# EAGLE board 4x1button v23 (EAGLE 9.7.0)
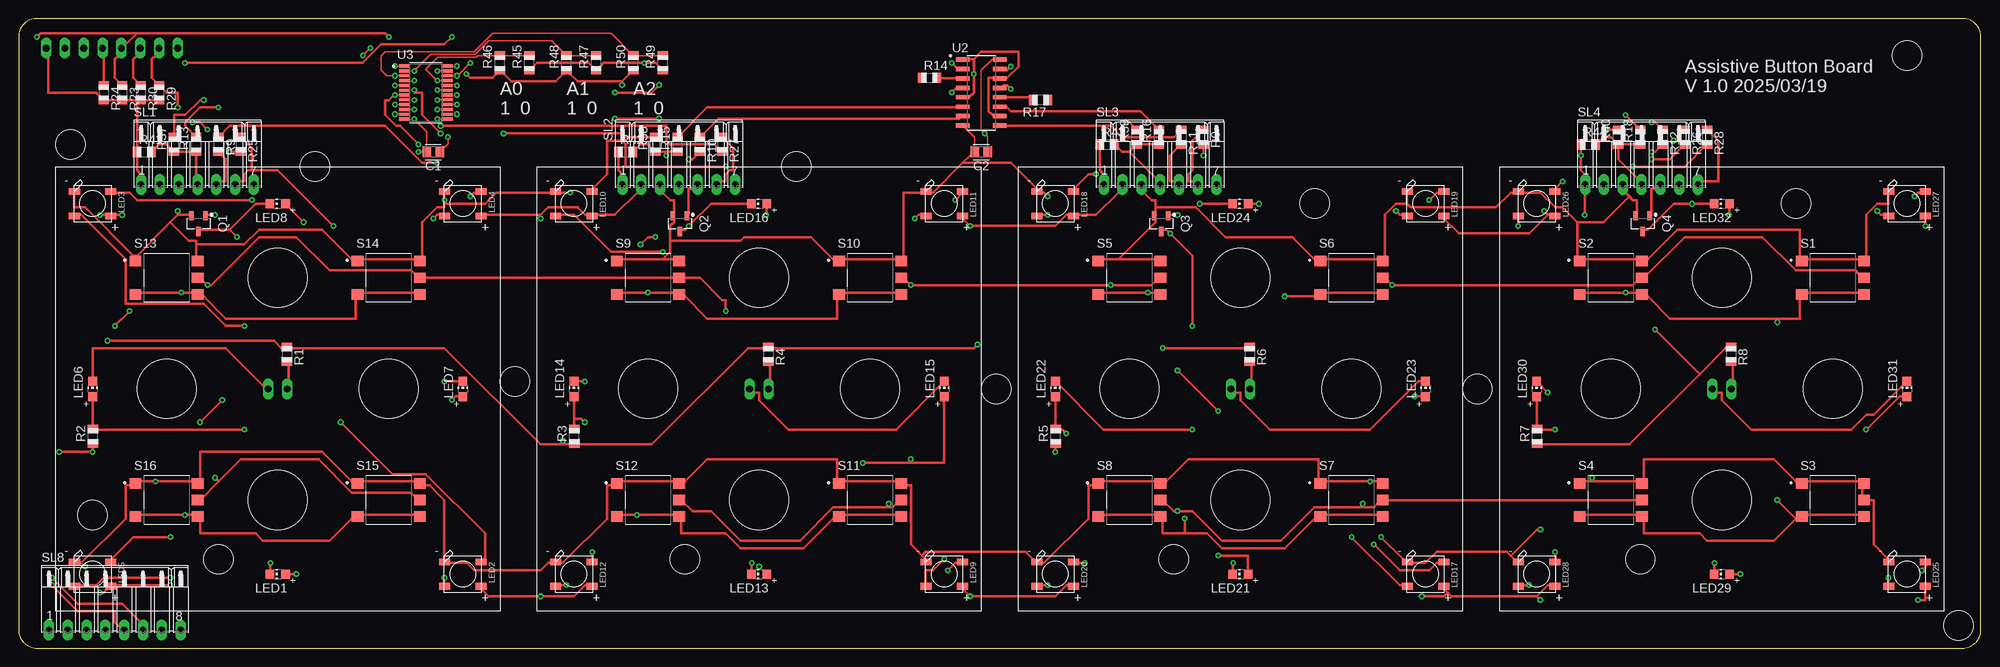
[diagram p0: board, top side]
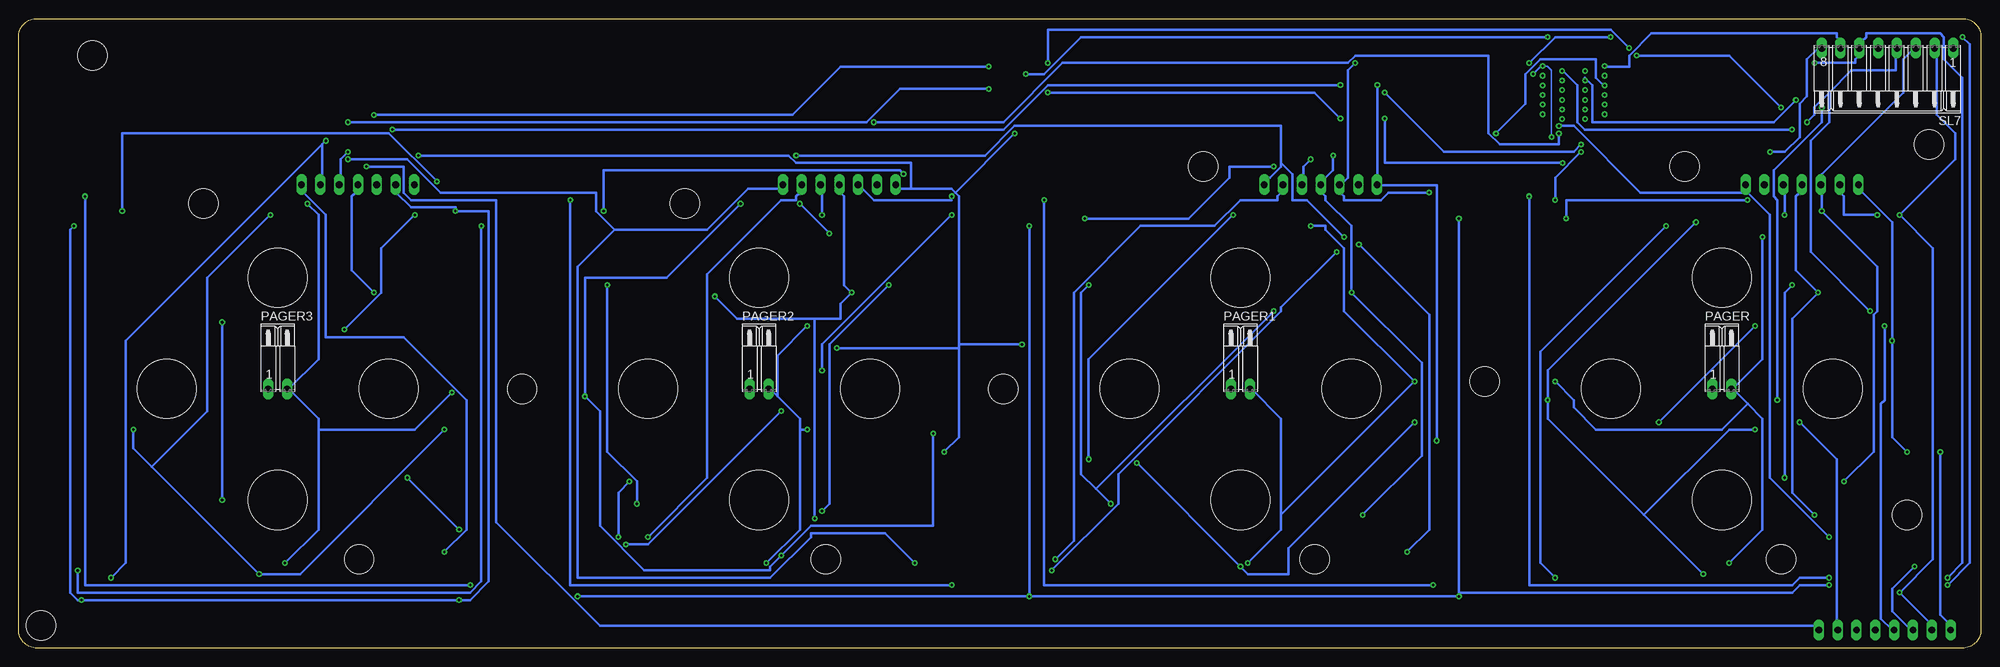
[diagram p1: board, bottom side, seen from below]

Size 265 x 85 mm. Coordinates in mm from the lower left corner, seen from the top.
Outline: 262.5,85 2.5,85 arc90 0,82.5 0,2.5 arc90 2.5,0 262.5,0 arc90 265,2.5 265,82.5 arc90 262.5,85
Copper layers (1*16): Top 0.035mm / dielectric 1.5mm / Bottom 0.035mm
Design rules "Fusion Electronics Design Rules": minimum track width 6mil, minimum drill 0.35mm, track to track 6mil, track to pad 6mil, pad to pad 6mil, via to via 6mil, smd to smd 6mil, copper to edge 40mil, drill to drill 6mil, minimum pad ring 10mil, minimum via ring 8mil, stop-mask expansion 4mil, vias tented up to drill 0mil, thermal gap 10mil
Holes 8 mm at 35,50 50,35 35,20 20,35 100,50 115,35 100,20 85,35 165,50 180,35 165,20 150,35 230,50 245,35 230,20 215,35
Holes 4 mm at 255,80 261.95,3.05 27,12 90,12 156,12 219,12 132,35 197,35 67,36 7,68 10,18 40,65 105,65 175,60 240,60

## Footprints (pad centres in the part's own frame; a part is rotated, then mirrored left to right if it is on the bottom)
CAPC2012X110 = smd 1.165 x 1.465: 1 -0.875,0; 2 0.875,0
CHIP-LED0805 = smd 1.2 x 1.2: A 0,-1.05; C 0,1.05
WS2812B = smd 1.5 x 0.9: 1-VDD 2.45,-1.65; 2-DOUT 2.45,1.65; 3-GND -2.45,1.65; 4-DIN -2.45,-1.65
02PA = drill 0.914 long: 1 -1.27,0; 2 1.27,0
SOT95P237X112-3N = smd 1.224 x 0.625: 1 -1.064,0.95; 2 -1.064,-0.95; 3 1.064,0
R0805 = smd 1.1 x 1.4: 1 -1,0; 2 1,0
SW_SKHMQLE010 = smd 1.6 x 1.4: 1 -4.2,2.25; 2 4.2,2.25; 3 -4.2,-2.25; 4 4.2,-2.25; 5 4.2,0
07PA = drill 0.914 long: 1 -7.62,0; 2 -5.08,0; 3 -2.54,0; 4 0,0; 5 2.54,0; 6 5.08,0; 7 7.62,0
08PA = drill 0.914 long: 1 -8.89,0; 2 -6.35,0; 3 -3.81,0; 4 -1.27,0; 5 1.27,0; 6 3.81,0; 7 6.35,0; 8 8.89,0
SOIC127P600X175-16N = smd 1.97 x 0.6: 1 -2.475,4.445; 2 -2.475,3.175; 3 -2.475,1.905; 4 -2.475,0.635; 5 -2.475,-0.635; 6 -2.475,-1.905; 7 -2.475,-3.175; 8 -2.475,-4.445; 9 2.475,-4.445; 10 2.475,-3.175; 11 2.475,-1.905; 12 2.475,-0.635; 13 2.475,0.635; 14 2.475,1.905; 15 2.475,3.175; 16 2.475,4.445
SOP65P640X110-24N = smd 1.57 x 0.41: 1 -2.87,3.575; 2 -2.87,2.925; 3 -2.87,2.275; 4 -2.87,1.625; 5 -2.87,0.975; 6 -2.87,0.325; 7 -2.87,-0.325; 8 -2.87,-0.975; 9 -2.87,-1.625; 10 -2.87,-2.275; 11 -2.87,-2.925; 12 -2.87,-3.575; 13 2.87,-3.575; 14 2.87,-2.925; 15 2.87,-2.275; 16 2.87,-1.625; 17 2.87,-0.975; 18 2.87,-0.325; 19 2.87,0.325; 20 2.87,0.975; 21 2.87,1.625; 22 2.87,2.275; 23 2.87,2.925; 24 2.87,3.575

## Placement (x,y rotation side)
C1  0.1uf  [CAPC2012X110]  56,67 180 top
C2  0.1uf  [CAPC2012X110]  130,67 180 top
LED1  [CHIP-LED0805]  35,10 90 top
LED2  WS2812B-V5/W  [WS2812B]  60,10 0 top
LED3  WS2812B-V5/W  [WS2812B]  10,60 0 top
LED4  WS2812B-V5/W  [WS2812B]  60,60 0 top
LED5  WS2812B-V5/W  [WS2812B]  10,10 0 top
LED6  [CHIP-LED0805]  10,35 0 top
LED7  [CHIP-LED0805]  60,35 0 top
LED8  [CHIP-LED0805]  35,60 90 top
LED9  WS2812B-V5/W  [WS2812B]  125,10 0 top
LED10  WS2812B-V5/W  [WS2812B]  75,60 0 top
LED11  WS2812B-V5/W  [WS2812B]  125,60 0 top
LED12  WS2812B-V5/W  [WS2812B]  75,10 0 top
LED13  [CHIP-LED0805]  100,10 90 top
LED14  [CHIP-LED0805]  75,35 0 top
LED15  [CHIP-LED0805]  125,35 0 top
LED16  [CHIP-LED0805]  100,60 90 top
LED17  WS2812B-V5/W  [WS2812B]  190,10 0 top
LED18  WS2812B-V5/W  [WS2812B]  140,60 0 top
LED19  WS2812B-V5/W  [WS2812B]  190,60 0 top
LED20  WS2812B-V5/W  [WS2812B]  140,10 0 top
LED21  [CHIP-LED0805]  165,10 90 top
LED22  [CHIP-LED0805]  140,35 0 top
LED23  [CHIP-LED0805]  190,35 0 top
LED24  [CHIP-LED0805]  165,60 90 top
LED25  WS2812B-V5/W  [WS2812B]  255,10 0 top
LED26  WS2812B-V5/W  [WS2812B]  205,60 0 top
LED27  WS2812B-V5/W  [WS2812B]  255,60 0 top
LED28  WS2812B-V5/W  [WS2812B]  205,10 0 top
LED29  [CHIP-LED0805]  230,10 90 top
LED30  [CHIP-LED0805]  205,35 0 top
LED31  [CHIP-LED0805]  255,35 0 top
LED32  [CHIP-LED0805]  230,60 90 top
PAGER  PAGER  [02PA]  35,35 0 bottom
PAGER1  PAGER  [02PA]  100,35 0 bottom
PAGER2  PAGER  [02PA]  165,35 0 bottom
PAGER3  PAGER  [02PA]  230,35 0 bottom
Q1  MMUN2216  [SOT95P237X112-3N]  24.29,57.31 270 top
Q2  MMUN2216  [SOT95P237X112-3N]  89.29,57.31 270 top
Q3  MMUN2216  [SOT95P237X112-3N]  154.29,57.31 270 top
Q4  MMUN2216  [SOT95P237X112-3N]  219.29,57.31 270 top
R0  10  [R0805]  160,69 270 top
R1  10  [R0805]  36.23,39.66 270 top
R2  330  [R0805]  10.07,28.61 90 top
R3  330  [R0805]  75.07,28.61 90 top
R4  10  [R0805]  101.23,39.66 270 top
R5  330  [R0805]  140.07,28.61 90 top
R6  10  [R0805]  166.23,39.66 270 top
R7  330  [R0805]  205.07,28.61 90 top
R8  10  [R0805]  231.23,39.66 270 top
R9  10  [R0805]  27,68 270 top
R10  10  [R0805]  92,68 270 top
R11  10  [R0805]  157,69 270 top
R12  10  [R0805]  222,69 270 top
R13  10  [R0805]  24,68 90 top
R14  10  [R0805]  123,77 0 top
R15  10  [R0805]  89,68 90 top
R16  10  [R0805]  154,69 90 top
R17  10  [R0805]  138,74 180 top
R18  10  [R0805]  219,69 90 top
R23  2k  [R0805]  14,75 270 top
R24  2k  [R0805]  11.5,75 270 top
R25  0  [R0805]  30,68 270 top
R26  0  [R0805]  225,69 270 top
R27  0  [R0805]  95,68 270 top
R28  0  [R0805]  228,69 270 top
R29  2k  [R0805]  19,75 270 top
R30  2k  [R0805]  16.5,75 270 top
R37  10  [R0805]  21,68 90 top
R38  10  [R0805]  86,68 90 top
R39  10  [R0805]  151,69 90 top
R40  10  [R0805]  216,69 90 top
R41  1k  [R0805]  17,67 0 top
R42  1k  [R0805]  82,67 0 top
R43  1k  [R0805]  147,68 0 top
R44  1k  [R0805]  212,68 0 top
R45  10  [R0805]  69,79 90 top
R46  DNP_10  [R0805]  65,79 90 top
R47  10  [R0805]  78,79 90 top
R48  DNP_10  [R0805]  74,79 90 top
R49  10  [R0805]  87,79 90 top
R50  DNP_10  [R0805]  83,79 90 top
S1  SKHMQLE010  [SW_SKHMQLE010]  245,50 0 top
S2  SKHMQLE010  [SW_SKHMQLE010]  215,50 0 top
S3  SKHMQLE010  [SW_SKHMQLE010]  245,20 0 top
S4  SKHMQLE010  [SW_SKHMQLE010]  215,20 0 top
S5  SKHMQLE010  [SW_SKHMQLE010]  150,50 0 top
S6  SKHMQLE010  [SW_SKHMQLE010]  180,50 0 top
S7  SKHMQLE010  [SW_SKHMQLE010]  180,20 0 top
S8  SKHMQLE010  [SW_SKHMQLE010]  150,20 0 top
S9  SKHMQLE010  [SW_SKHMQLE010]  85,50 0 top
S10  SKHMQLE010  [SW_SKHMQLE010]  115,50 0 top
S11  SKHMQLE010  [SW_SKHMQLE010]  115,20 0 top
S12  SKHMQLE010  [SW_SKHMQLE010]  85,20 0 top
S13  SKHMQLE010  [SW_SKHMQLE010]  20,50 0 top
S14  SKHMQLE010  [SW_SKHMQLE010]  50,50 0 top
S15  SKHMQLE010  [SW_SKHMQLE010]  50,20 0 top
S16  SKHMQLE010  [SW_SKHMQLE010]  20,20 0 top
SL1  [07PA]  24.16,62.56 0 top
SL2  [07PA]  89.16,62.56 0 top
SL3  [07PA]  154.16,62.56 0 top
SL4  [07PA]  219.16,62.56 0 top
SL7  [08PA]  12.62,81 180 bottom
SL8  [08PA]  13,2.44 0 top
U2  SN74LS279ADR  [SOIC127P600X175-16N]  130,75 0 top
U3  PCA9555PW,118  [SOP65P640X110-24N]  55,75 0 top

## Library data of the parts
C1 C2 = Capacitor; CATEGORY: Capacitor; PACKAGE_SIZE: 0805; PACKAGE_TYPE: SMD; SUBCATEGORY: Ceramic Capacitors; TYPE: MLCC
LED1-LED32 R0 R1-R18 R23-R30 R37-R50 = adafruit
PAGER PAGER1-PAGER3 SL1-SL4 SL7 SL8 = con-amp-quick; OC_FARNELL: unknown; OC_NEWARK: unknown
Q1-Q4 = Transistor; CATEGORY: Transistor; DATASHEET: https://www.analog.com/media/en/package-pcb-resources/package/pkg_pdf/ltc-legacy-sot-23/sot3%2005-08-1631%20rev%20d.pdf; DESCRIPTION: Generic NPN Transistor Surface Mount SOT23-BEC Package; PACKAGE_SIZE: SOT-23; PACKAGE_TYPE: SMD; SUBCATEGORY: BJT; TYPE: NPN
S1-S16 = SKHMQLE010; MANUFACTURER: E-Switch; MAXIMUM_PACKAGE_HEIGHT: 3.4 mm; STANDARD: Manufacturer Recommendations
U2 = SN74LS279ADR
U3 = PCA9555PW_118; MANUFACTURER: NXP; MAXIMUM_PACKAGE_HEIGHT: 1.1mm; PARTREV: 10; STANDARD: IPC 7351B

## Nets
1S2: R14.1
3S2: R17.1
5: S1.5 S2.5 S4.5 S5.5 S6.5 S7.5 S8.5 S9.5 S10.5 S11.5 S12.5 S13.5 S14.5 S15.5 S16.5
!INT: R29.1 SL7.7 SL8.7 U3.1
!RESET: R30.1 SL7.6 SL8.6 U2.1 U2.5 U2.10 U2.14
+3V3: C1.1 C2.1 R1.1 R2.1 R3.1 R4.1 R5.1 R6.1 R7.1 R8.1 R23.2 R24.2 R29.2 R30.2 R41.1 R42.1 R43.1 R44.1 R46.1 R48.1 R50.1 SL1.1 SL2.1 SL3.1 SL4.1 SL7.1 SL8.1 U2.16 U3.24
+5: LED2.1-VDD LED3.1-VDD LED4.1-VDD LED5.1-VDD LED9.1-VDD LED10.1-VDD LED11.1-VDD LED12.1-VDD LED17.1-VDD LED18.1-VDD LED19.1-VDD LED20.1-VDD LED25.1-VDD LED26.1-VDD LED27.1-VDD LED28.1-VDD SL1.2 SL2.2 SL3.2 SL4.2 SL7.2 SL8.2
A0: R45.2 R46.2 U3.21
A1: R47.2 R48.2 U3.2
A2: R49.2 R50.2 U3.3
BUTTON1: R13.1 R37.1 R41.2 S13.3 S13.4 S14.3 S14.4 S15.3 S15.4 S16.3 S16.4 SL1.4
BUTTON2: R15.1 R38.1 R42.2 S9.3 S9.4 S10.3 S10.4 S11.3 S11.4 S12.3 S12.4 SL2.4
BUTTON3: R16.1 R39.1 R43.2 S5.3 S5.4 S6.3 S6.4 S7.3 S7.4 S8.3 S8.4 SL3.4
BUTTON4: R18.1 R40.1 R44.2 S1.3 S1.4 S2.3 S2.4 S3.3 S3.4 S4.3 S4.4 SL4.4
D_IN1: LED2.4-DIN R25.1 SL1.6
D_IN2: LED9.4-DIN R27.1 SL2.6
D_IN3: LED17.4-DIN R0.1 SL3.6
D_IN4: LED25.4-DIN R26.1 SL4.6
D_OUT1: LED5.2-DOUT R27.2 SL1.7
D_OUT2: LED12.2-DOUT R0.2 SL2.7
D_OUT3: LED20.2-DOUT R26.2 SL3.7
D_OUT4: LED28.2-DOUT R28.1 SL4.7
FEED1: LED1.C LED6.C LED7.C LED8.C PAGER.2 Q1.3
FEED2: LED13.C LED14.C LED15.C LED16.C PAGER1.2 Q2.3
FEED3: LED21.C LED22.C LED23.C LED24.C PAGER2.2 Q3.3
FEED4: LED29.C LED30.C LED31.C LED32.C PAGER3.2 Q4.3
FEEDBACK1: Q1.1 R9.2 SL1.5
FEEDBACK2: Q2.1 R10.2 SL2.5
FEEDBACK3: Q3.1 R11.2 SL3.5
FEEDBACK4: Q4.1 R12.2 SL4.5
GND: C1.2 C2.2 LED2.3-GND LED3.3-GND LED4.3-GND LED5.3-GND LED9.3-GND LED10.3-GND LED11.3-GND LED12.3-GND LED17.3-GND LED18.3-GND LED19.3-GND LED20.3-GND LED25.3-GND LED26.3-GND LED27.3-GND LED28.3-GND Q1.2 Q2.2 Q3.2 Q4.2 R45.1 R47.1 R49.1 S1.1 S1.2 S2.1 S2.2 S3.1 S3.2 S3.5 S4.1 S4.2 S5.1 S5.2 S6.1 S6.2 S7.1 S7.2 S8.1 S8.2 S9.1 S9.2 S10.1 S10.2 S11.1 S11.2 S12.1 S12.2 S13.1 S13.2 S14.1 S14.2 S15.1 S15.2 S16.1 S16.2 SL1.3 SL2.3 SL3.3 SL4.3 SL7.3 SL8.3 U2.8 U3.12
IO0_0: R37.2 U3.4
IO0_1: R38.2 U3.5
IO0_2: R39.2 U3.6
IO0_3: R40.2 U3.7
IO0_4: U3.8
IO0_5: U3.9
IO0_6: U3.10
IO0_7: U3.11
IO1_0: U3.13
IO1_1: U3.14
IO1_2: U3.15
IO1_3: U3.16
IO1_4: U3.17
IO1_5: U3.18
IO1_6: U3.19
IO1_7: U3.20
N$1: PAGER.1 R1.2
N$2: LED4.2-DOUT LED5.4-DIN
N$3: LED9.2-DOUT LED10.4-DIN
N$4: LED10.2-DOUT LED11.4-DIN
N$5: LED13.A LED14.A LED15.A LED16.A R3.2
N$6: PAGER1.1 R4.2
N$7: LED17.2-DOUT LED18.4-DIN
N$8: LED18.2-DOUT LED19.4-DIN
N$9: LED21.A LED22.A LED23.A LED24.A R5.2
N$10: PAGER2.1 R6.2
N$11: LED25.2-DOUT LED26.4-DIN
N$12: LED26.2-DOUT LED27.4-DIN
N$13: LED29.A LED30.A LED31.A LED32.A R7.2
N$14: PAGER3.1 R8.2
N$15: R9.1 U2.4
N$16: R10.1 U2.7
N$17: R11.1 U2.9
N$18: R12.1 U2.13
N$19: R13.2 U2.2
N$20: R14.2 U2.3
N$21: R15.2 U2.6
N$22: R16.2 U2.11
N$23: R17.2 U2.12
N$24: R18.2 U2.15
N$29: LED27.2-DOUT LED28.4-DIN
N$30: LED19.2-DOUT LED20.4-DIN
N$31: LED11.2-DOUT LED12.4-DIN
N$35: LED1.A LED6.A LED7.A LED8.A R2.2
N$38: LED2.2-DOUT LED3.4-DIN
N$39: LED3.2-DOUT LED4.4-DIN
NEO_PIXEL_IN: R25.2 SL7.8
NEO_PIXEL_OUT: R28.2 SL8.8
SCL: R23.1 SL7.5 SL8.5 U3.22
SDA: R24.1 SL7.4 SL8.4 U3.23

## Tracks (layer width: path | path; a pad name or v marks a point on that pad's centre or on a via)
5  (via drill 0.35)
  Top 0.35: S1.5 249.5,50 249,50.5 248.5,50.5 248,51 240,51 235.5,55.5 225,55.5 219.5,50 S2.5 219,50 218,49 v185.5,49 184.5,50 S6.5 | 181.5,19 183,19 183.5,19.5 184,19.5 | 181.5,19 175,19 170.5,14.5 162.5,14.5 158.5,18.5 v156.5,18.5 156,18.5 154.5,20 S8.5 | 184,19.5 184.5,20 S7.5 184,19.5 | 181.5,19 v181.5,19.5 | S4.5 185,20 184.5,19.5 184,19.5 | 117.5,19 118,19 118.5,19.5 119,19.5 119.5,20 S11.5 | 117.5,19 110,19 105.5,14.5 97.5,14.5 93.5,18.5 91,18.5 89.5,20 S12.5 | 117.5,19 v117.5,19.5 | S10.5 119.5,50 v120.5,49 v147.5,49 153,49 154,50 S5.5 | 27,22.5 30,25.5 40.5,25.5 45,21 53,21 53.5,20.5 54,20.5 54.5,20 S15.5 | 27,22.5 24.5,20 S16.5 | 27,22.5 v26.5,23 | S13.5 24.5,50 v25.5,49 26,49 32.5,55.5 37.5,55.5 42,51 53,51 54,50 S14.5 S9.5 92,50 95,47 95.5,47 v95.5,45.5
  Bottom 0.35: v185.5,49 185.5,26.5 181.5,22.5 v181.5,19.5 | v120.5,49 121.5,48 121.5,23.5 119.5,21.5 | v117.5,19.5 119.5,21.5 | v25.5,49 26.5,48 v26.5,23 | v95.5,45.5 119.5,21.5 | v156.5,18.5 155.5,19.5 155.5,41 v147.5,49
!INT  (via drill 0.35)
  Top 0.152: U3.1 v50.81,78.58
  Top 0.35: SL7.7 18.5,81 18.5,80 18,79.5 18,77 R29.1 19.5,76 19.5,75.5 20,75 21.5,75 v21.5,73 | v27.5,33.5 v24.5,30.5
  Bottom 0.35: v50.81,78.58 50.5,78.5 47.5,78.5 47.5,80 44.5,83 19.5,83 19.5,82.5 19,82 19,81 SL7.7 | v24.5,30.5 19.5,25.5 19.5,2.5 SL8.7 | v27.5,33.5 27.5,60.5 28,61 28,64.5 21.5,71 v21.5,73
!RESET  (via drill 0.35)
  Top 0.35: U2.10 132,72 131.5,72 131,72.5 131,77 132,77 U2.14 132.5,77 133.5,77 135,78.5 135,80.5 130,80.5 129,79.5 | 129,79.5 v129,77.5 129,75 128.5,74.5 128,74.5 U2.5 | 129,79.5 128,79.5 U2.1 | R30.1 15.5,77 15.5,79.5 16,80 16,81 SL7.6 | v4.5,9.5 8,6 14,6 16.5,3.5 16.5,2.5 SL8.6 | v58.5,82.5 57.5,81.5 49,81.5 46.5,79 v22.5,79
  Bottom 0.35: v4.5,9.5 2.5,11.5 2.5,77 5,79.5 5,82.5 5.5,83 15.5,83 15.5,82.5 16,82 16,81 SL7.6 16.5,81 16.5,80 17,79.5 17,79 v22.5,79 | v129,77.5 126.5,77.5 121.5,82.5 v58.5,82.5
+3V3  (via drill 0.35)
  Top 0.152: U3.24 v59.19,78.58
  Top 0.2: C1.1 58,68.12 v58,69 | C2.1 130.88,69.12 v130.5,69.5 130,70 130,78 131.44,79.44 U2.16
  Top 0.35: R44.1 v211,66.5 211,64.5 211.5,64 211.5,63 SL4.1 211.5,62.5 v211.5,58.5 | 227,37 230.5,40.5 231,40.5 R8.1 | 227,37 217.5,27.5 205.5,27.5 R7.1 | 227,37 v221,43 | v140,26.5 140,27.5 R5.1 | v154.5,40.5 166,40.5 R6.1 | R43.1 146,64.5 146.5,64 146.5,63 SL3.1 | v5.5,26.5 v10,26.5 10,27.5 R2.1 | SL1.1 16.5,63 16.5,64 16,64.5 R41.1 16,74 | 16,74 R23.2 R24.2 11,74 11,74.5 10.5,75 4,75 4,81 SL7.1 | R29.2 R30.2 16,74 | R42.1 81,64.5 81.5,64 81.5,63 SL2.1 | 81.5,76.5 R50.1 | 81.5,76.5 75.5,76.5 74.5,77.5 74.5,78 R48.1 73.5,78 73.5,77.5 72.5,76.5 66.5,76.5 R46.1 64.5,78 64.5,77.5 64,77 61,77 v60.5,77.5 | 81.5,76.5 v81.5,76 | 73.5,27.5 75,27.5 R3.1 75.5,27.5 85.5,27.5 98.5,40.5 101,40.5 R4.1 101.5,40.5 129,40.5 v129.5,41 | 73.5,27.5 70.5,27.5 57.5,40.5 36.5,40.5 R1.1 36,40.5 35.5,40.5 34.5,41.5 v12,41.5 | 73.5,27.5 v73.5,28
  Bottom 0.2: v58,69 58,78 58.58,78.58 v59.19,78.58
  Bottom 0.35: v211.5,58.5 216,54 216,48 v221,43 | v140,26.5 138,28.5 138,40.5 | 138,41 138,61 138.5,61.5 | 138,41 138,40.5 | 138.5,61.5 139,62 144.5,62 | 144.5,62 146.5,62 146.5,62.5 SL3.1 | 138,40.5 v154.5,40.5 | 138.5,61.5 v130.5,69.5 | v211,66.5 161,66.5 160,65.5 144.5,65.5 144.5,62 | v5.5,26.5 5.5,4.5 4.5,3.5 4.5,2.5 SL8.1 | v10,26.5 12,28.5 v12,41.5 12,57.5 16.5,62 16.5,62.5 SL1.1 | v81.5,76 81.5,63 SL2.1 81.5,62.5 73.5,62.5 v73.5,28 | v60.5,77.5 59.5,78.5 v59.19,78.58 | v129.5,41 138,41
+5  (via drill 0.35)
  Top 0.35: 206.5,58.5 204,56 194.5,56 192.5,58 LED19.1-VDD | 206.5,58.5 207,58.5 LED26.1-VDD | 206.5,58.5 v206,59 | 193,7.5 193.5,7 205,7 | 193,7.5 192.5,8 LED17.1-VDD | 205,7 206.5,8.5 207,8.5 LED28.1-VDD | v256.5,6.5 257.5,6.5 257.5,8 LED25.1-VDD | 205,7 v205.5,6.5 | v257.5,57 257.5,58 LED27.1-VDD | v11,7.5 11.5,7.5 12,8 LED5.1-VDD 12.5,8.5 v20.5,8.5 | v14,58.5 12.5,58.5 LED3.1-VDD 12,58.5 v11,58.5 | LED11.1-VDD 127.5,58 v128.5,57 140,57 141.5,58.5 142,58.5 LED18.1-VDD 142.5,58.5 145.5,58.5 148.5,61.5 149,61.5 149,62.5 SL3.2 | LED9.1-VDD 127.5,8 v128.5,7 140,7 141.5,8.5 142,8.5 LED20.1-VDD | LED2.1-VDD 62.5,8 63.5,7 v70.5,7 75,7 76.5,8.5 77,8.5 LED12.1-VDD | 70.5,58.5 62.5,58.5 LED4.1-VDD | 70.5,58.5 71.5,59.5 75.5,59.5 76.5,58.5 77,58.5 LED10.1-VDD 77.5,58.5 80.5,58.5 83.5,61.5 84,61.5 84,62.5 SL2.2 | 70.5,58.5 v70.5,58 | 193,7.5 192.5,7 v189.5,7
  Bottom 0.35: SL4.2 214,62.5 214,61.5 212,59.5 206,59.5 v206,59 201.5,59 201.5,9 204,6.5 v205.5,6.5 v256.5,6.5 257,6.5 258,7.5 258,56.5 v257.5,57 | SL8.2 7,2.5 7,3.5 v11,7.5 6.5,12 6.5,54 v11,58.5 3.5,66 3.5,69.5 6,72 6,81 SL7.2 | v14,58.5 18.5,58.5 18.5,61 19,61.5 19,62.5 SL1.2 | v70.5,58 70.5,7.5 | 70.5,7.5 v70.5,7 v128.5,7 | v128.5,7 v128.5,57 | v20.5,8.5 24.5,8.5 25.5,7.5 70.5,7.5 | v128.5,7 v189.5,7
A0  (via drill 0.35)
  Top 0.152: U3.21 v56.55,76.62
  Top 0.2: v56.55,76.62 55,78.18 56.62,79.8 61.79,79.8 62,80 R46.2 R45.2
A1  (via drill 0.35)
  Top 0.152: U3.2 v53.45,77.92
  Top 0.2: R47.2 R48.2 72,82 63.5,82 61.65,80.15 55.67,80.15 v53.45,77.92
A2  (via drill 0.35)
  Top 0.152: U3.3 v50.81,77.28
  Top 0.2: v50.81,77.28 49.73,77.28 49,78 49,80 49.5,80.5 61.5,80.5 64,83 80,83 R50.2 R49.2
BUTTON1  (via drill 0.35)
  Top 0.35: S16.3 16,18 v22.5,18 24,18 S16.4 24.5,17.5 24.5,15.5 32,15.5 33,14.5 42,14.5 45,17.5 45.5,17.5 S15.3 46,18 54,18 S15.4 | S14.4 54,48 46,48 S14.3 45.5,47.5 45.5,44.5 28,44.5 25,47.5 24.5,47.5 S13.4 24,48 v22,48 16,48 S13.3 | R41.2 19,68 20,68 20.5,67.5 20.5,67 R37.1 R13.1 24,63 SL1.4
  Bottom 0.35: SL1.4 24.5,62.5 24.5,61.5 25,61 25,51 v22,48 25.5,44.5 25.5,21 v22.5,18
BUTTON2  (via drill 0.35)
  Top 0.35: S12.3 81,18 v83.5,18 89,18 S12.4 89.5,17.5 89.5,15.5 95.5,15.5 97.5,13.5 106,13.5 110,17.5 110.5,17.5 S11.3 111,18 119,18 S11.4 | S10.4 119,48 111,48 S10.3 110.5,47.5 110.5,44.5 93,44.5 90,47.5 89.5,47.5 S9.4 89,48 v85,48 81,48 S9.3 | R42.2 84,68 85,68 85.5,67.5 85.5,67 R38.1 87.5,67 | 87.5,67 R15.1 | 87.5,67 v87.5,66.5
  Bottom 0.35: v87.5,66.5 87.5,64.5 89,63 SL2.4 89,62.5 89,61.5 88.5,61 88.5,60.5 85,57 v85,48 75.5,38.5 75.5,26 v83.5,18
BUTTON3  (via drill 0.35)
  Top 0.35: S8.3 146,18 154,18 S8.4 154.5,17.5 154.5,15.5 157.5,15.5 | S7.4 184,18 176,18 S7.3 175.5,17.5 175,17.5 171,13.5 162.5,13.5 160.5,15.5 157.5,15.5 | S6.4 184,48 176,48 S6.3 175.5,47.5 v171,47.5 | S5.3 146,48 v152.5,48 154,48 S5.4 | R43.2 149,67 150,67 | 150,67 150.5,67.5 150.5,68 R39.1 R16.1 | 150,67 154,63 SL3.4 | v157.5,17.5 157.5,15.5
  Bottom 0.35: SL3.4 154,62.5 154,61.5 153.5,61 153.5,49 v152.5,48 154,46.5 154,44.5 157.5,44.5 | v171,47.5 168,44.5 157.5,44.5 | 157.5,44.5 v157.5,17.5
BUTTON4  (via drill 0.35)
  Top 0.35: S4.3 211,18 219,18 S4.4 219.5,17.5 219.5,15.5 227,15.5 228,14.5 237,14.5 240,17.5 | S3.4 249,18 241,18 S3.3 240.5,17.5 240,17.5 | S1.4 249,48 241,48 S1.3 240.5,47.5 240.5,44.5 237.5,44.5 | S2.3 211,48 v217,48 219,48 S2.4 219.5,47.5 220,47.5 223,44.5 237.5,44.5 | R44.2 214,69 215,69 215.5,68.5 215.5,68 R40.1 | R40.1 R18.1 | R40.1 216,66 219,63 SL4.4 | v237.5,20 240,17.5 | 237.5,44.5 v237.5,44
  Bottom 0.35: v217,48 220,51 220,61 219.5,61.5 219.5,62.5 SL4.4 | v237.5,44 v237.5,20
D_IN1  (via drill 0.35)
  Top 0.35: R25.1 31.5,67.5 31.5,64.5 | 31.5,64.5 31,64.5 30.5,64 30.5,63 29.5,63 SL1.6 | v57.5,9.5 57.5,8.5 LED2.4-DIN | v42.5,57 35,64.5 31.5,64.5
  Bottom 0.35: v57.5,9.5 59.5,11.5 59.5,40 v42.5,57
D_IN2  (via drill 0.35)
  Top 0.35: R27.1 96.5,67.5 96.5,64.5 96,64.5 95.5,64 95.5,63 94.5,63 SL2.6 | v125,12 123.5,10.5 122.5,10.5 122.5,8.5 LED9.4-DIN
  Bottom 0.35: v125,12 122.5,14.5 122.5,48 113.5,57 103.5,57 100,60.5 95,60.5 95,61 94.5,61.5 94.5,62.5 SL2.6
D_IN3  (via drill 0.35)
  Top 0.35: R0.1 158.5,68.5 158.5,64.5 158,64 158,63 159,63 SL3.6 | v180,15 186.5,8.5 187.5,8.5 LED17.4-DIN
  Bottom 0.35: v180,15 172,23 172,50.5 162,60.5 160,60.5 160,61 159.5,61.5 159.5,62.5 SL3.6
D_IN4  (via drill 0.35)
  Top 0.35: v223.5,68.5 R26.1 | v252.5,9.5 252.5,8.5 LED25.4-DIN
  Bottom 0.35: 224,68 v223.5,68.5 | 224,68 224,63 SL4.6 | v252.5,9.5 250.5,11.5 250.5,41.5 224,68
D_OUT1  (via drill 0.35)
  Top 0.35: R27.2 94,68 88,68 87.5,68.5 87.5,70.5 v57,70.5 | v20.5,15 15.5,15 12.5,12 LED5.2-DOUT
  Bottom 0.35: v57,70.5 55,70.5 46,61.5 32,61.5 32,62 | 32,62 32,62.5 SL1.7 32,62 | v20.5,15 28.5,23 28.5,58.5 32,62
D_OUT2  (via drill 0.35)
  Top 0.35: v160,66.5 R0.2 | v77.5,13 77.5,12 LED12.2-DOUT | v84,54.5 85,55.5 v86,55.5
  Bottom 0.35: v160,66.5 134.5,66.5 130.5,70.5 94.5,70.5 94.5,65.5 | 94.5,65.5 94.5,65 96,63.5 96.5,63.5 96.5,63 SL2.7 | v77.5,13 74.5,16 74.5,45 v84,54.5 | v86,55.5 91,60.5 93,60.5 93,64 94.5,65.5
D_OUT3  (via drill 0.35)
  Top 0.35: R26.2 223,66 v220.5,66 | v144,11.5 142.5,11.5 LED20.2-DOUT
  Bottom 0.35: v220.5,66 212.5,66 208,61.5 187,61.5 187,59 184.5,56.5 | 184.5,56.5 172,56.5 166.5,62 162,62 162,62.5 SL3.7 | v144,11.5 148,15.5 158,15.5 158,15 163.5,9.5 189.5,9.5 189.5,51.5 184.5,56.5
D_OUT4  (via drill 0.35)
  Top 0.35: R28.1 229.5,68.5 229.5,63 227,63 SL4.7 | v207.5,13 207.5,12 LED28.2-DOUT
  Bottom 0.35: v207.5,13 204.5,16 204.5,33.5 213,42 223.5,42 223.5,58.5 226.5,61.5 226.5,62.5 SL4.7
FEED1  (via drill 0.35)
  Top 0.35: LED8.C 32,60 28.5,56.5 | 28.5,56.5 24.5,56.5 Q1.3 | v34,11.5 34,10 LED1.C | LED6.C 10,40.5 28,40.5 33,35.5 33.5,35.5 34,35 PAGER.2 | v57.5,36 60,36 LED7.C | v29.5,55.5 28.5,56.5
  Bottom 0.35: v34,11.5 29.5,16 29.5,31 31.5,33 | 33.5,35 31.5,33 | v57.5,36 55,33.5 55,32.5 52,29.5 35,29.5 31.5,33 | v29.5,55.5 29.5,39 33.5,35 | 33.5,35 PAGER.2
FEED2  (via drill 0.35)
  Top 0.35: LED16.C 93.5,60 v90.5,57 90,56.5 89.5,56.5 Q2.3 | v99,11.5 99,10 LED13.C | v76.5,36 75,36 LED14.C | LED15.C 125,36 118.5,29.5 104,29.5 100,33.5 100,34.5 99,34.5 98.5,35 PAGER1.2
  Bottom 0.35: v99,11.5 94.5,16 94.5,18 | 94.5,18 94.5,31 98.5,35 PAGER1.2 | 94.5,18 v76.5,36 86,45.5 86,54 88.5,56.5 88.5,57 v90.5,57
FEED3  (via drill 0.35)
  Top 0.35: v159.5,60 LED24.C | Q3.3 154.5,56.5 155,56.5 v155.5,56 158.5,53 v158.5,43.5 | v164,11.5 164,10 LED21.C | v158.5,29.5 146.5,29.5 140,36 LED22.C | LED23.C 190,36 189,36 182.5,29.5 169,29.5 165,33.5 165,34.5 164,34.5 163.5,35 PAGER2.2
  Bottom 0.35: v155.5,56 v159.5,60 | v164,11.5 159.5,16 159.5,29.5 | 159.5,29.5 159.5,31 162.5,34 | 162.5,34 163.5,35 PAGER2.2 | 159.5,29.5 v158.5,29.5 | v158.5,43.5 162.5,39.5 162.5,34
FEED4  (via drill 0.35)
  Top 0.35: LED32.C v226,60 223.5,60 220,56.5 219.5,56.5 Q4.3 | v229,11.5 229,10 LED29.C | v206.5,34.5 205,36 LED30.C | LED31.C 255,36 250.5,31.5 249.5,31.5 247.5,29.5 234,29.5 230,33.5 230,34.5 229,34.5 228.5,35 PAGER3.2
  Bottom 0.35: v229,11.5 224.5,16 224.5,29.5 | 224.5,29.5 224.5,31 228.5,35 | v206.5,34.5 211.5,29.5 224.5,29.5 | v226,60 224.5,58.5 224.5,39 228.5,35 | 228.5,35 PAGER3.2
FEEDBACK1  (via drill 0.35)
  Top 0.35: v26.5,58.5 25.5,58.5 Q1.1 | R9.2 28,66 28,63 27,63 SL1.5
  Bottom 0.35: v26.5,58.5 26.5,62.5 SL1.5
FEEDBACK2  (via drill 0.35)
  Top 0.35: Q2.1 90.5,58.5 90.5,62 91.5,62 92,62.5 SL2.5 | R10.2 91,66 v90.5,66
  Bottom 0.35: v90.5,66 91.5,65 91.5,63 SL2.5
FEEDBACK3  (via drill 0.35)
  Top 0.35: v156.5,58.5 155.5,58.5 Q3.1 | R11.2 155.5,66.5 155.5,63 156.5,63 SL3.5
  Bottom 0.35: v156.5,58.5 156.5,62.5 SL3.5
FEEDBACK4  (via drill 0.35)
  Top 0.35: Q4.1 220.5,58.5 220.5,62 221.5,62 222,62.5 SL4.5 | R12.2 221,67 v220.5,67
  Bottom 0.35: v220.5,67 221.5,66 221.5,63 SL4.5
GND  (via drill 0.35)
  Top 0.152: U3.12 v53.45,71.42
  Top 0.2: v53.45,71.42 55.12,69.75 C1.2 | U2.8 129.12,68.95 C2.2
  Top 0.35: S7.2 184,22.5 v182.5,22.5 176,22.5 S7.1 175.5,22.5 175.5,25.5 158,25.5 155,22.5 154.5,22.5 S8.2 154,22.5 146,22.5 S8.1 145.5,22 144.5,22 144.5,17.5 138.5,11.5 138,11.5 LED20.3-GND 137.5,11.5 137,11.5 137,12 136,13 122.5,13 122,12.5 | 201.5,12.5 202,12 202,11.5 202.5,11.5 LED28.3-GND | 201.5,12.5 201,13 191.5,13 190,11.5 188,11.5 LED17.3-GND 187.5,11.5 187,11.5 187,12 v184,15 | LED25.3-GND 252.5,12 250.5,14 250.5,20 S3.5 249,20 249,22 S3.2 249,22.5 241,22.5 S3.1 240.5,22.5 240,22.5 237,25.5 219.5,25.5 219.5,22.5 S4.2 219,22.5 212.5,22.5 | 212.5,22.5 211,22.5 S4.1 | 201.5,12.5 205,16 v205.5,16 | 212.5,22.5 v212.5,23 | 122,12.5 120.5,14 120.5,22 119.5,22 S11.2 119,22.5 111,22.5 S11.1 110.5,22.5 110.5,25.5 93,25.5 90,22.5 89.5,22.5 S12.2 89,22.5 81,22.5 S12.1 80.5,22 79.5,22 79.5,17.5 73.5,11.5 73,11.5 LED12.3-GND 72.5,11.5 71.5,11.5 70.5,10.5 61.5,10.5 60.5,11.5 58,11.5 LED2.3-GND 57.5,12 57.5,20 55.5,22 54.5,22 S15.2 54,22.5 46,22.5 S15.1 45.5,22.5 45,22.5 41,26.5 24.5,26.5 24.5,22.5 S16.2 24,22.5 v18.5,22.5 16,22.5 S16.1 15.5,22 14.5,22 14.5,17.5 8.5,11.5 | 122,12.5 122.5,12 LED9.3-GND | 8.5,11.5 8,11.5 LED5.3-GND | 8.5,11.5 v9,11 | 21.5,58.5 23.5,58.5 Q1.2 | 16,53 15.5,52.5 S13.1 | 16,53 20.5,57.5 | 20.5,57.5 21.5,58.5 | 16,53 15.5,53 9,59.5 7.5,59.5 7.5,61.5 LED3.3-GND | 24,54.5 24,55 23,55 20.5,57.5 | 24,54.5 24,52.5 S13.2 | 21.5,58.5 v21.5,59 | 57.5,60 57.5,59.5 56.5,59.5 54.5,57.5 54.5,52.5 S14.2 54,52.5 46,52.5 S14.1 45.5,52.5 45,52.5 41,56.5 32.5,56.5 30.5,54.5 24,54.5 | 57.5,60 v57.5,60.5 57.5,61.5 LED4.3-GND | 57.5,60 63,60 64.5,61.5 72.5,61.5 LED10.3-GND 73,61.5 v74.5,61.5
  Top 0.35: v54,67 C1.2 | R45.1 70,79 77,79 77.5,78.5 77.5,78 R47.1 78.5,78 78.5,78.5 79,79 v84.5,79 86,79 R49.1 | SL2.3 87,62.5 87,61.5 88,60.5 88.5,60.5 88.5,58.5 Q2.2 88.5,58 88.5,57.5 88,57 88,55 | 87,52.5 89,52.5 S9.2 | 87,52.5 81,52.5 S9.1 | 88,55 88,53.5 87,52.5 | 153.5,59.5 153.5,60.5 153,60.5 152,61.5 152,62.5 SL3.3 | 153.5,59.5 153.5,58.5 Q3.2 153.5,58 153.5,57.5 148.5,52.5 | 148.5,52.5 154,52.5 S5.2 | 148.5,52.5 146,52.5 S5.1 | 127.5,65.5 128.5,66.5 129,66.5 129.5,67 C2.2 | 127.5,65.5 123.5,61.5 123,61.5 LED11.3-GND 122.5,61.5 119.5,61.5 119.5,52.5 S10.2 119,52.5 111,52.5 S10.1 110.5,52.5 110,52.5 107,55.5 98,55.5 97.5,55 88,55 | 127.5,65.5 134,65.5 137.5,62 LED18.3-GND 138,61.5 138.5,61.5 v139,61 | LED27.3-GND 252.5,61.5 252.5,60 251,60 249.5,58.5 249.5,52.5 S1.2 249,52.5 241,52.5 S1.1 240.5,52.5 240.5,56.5 224,56.5 220,52.5 219.5,52.5 S2.2 219,52.5 211,52.5 S2.1 210.5,52.5 210.5,57.5 | 187.5,60 187.5,61.5 LED19.3-GND | 187.5,60 186,60 184.5,58.5 184.5,52.5 S6.2 184,52.5 176,52.5 S6.1 175.5,52.5 175,52.5 172,55.5 163,55.5 159,59.5 153.5,59.5 | 217.5,61 217,61.5 217,62.5 SL4.3 | 217.5,61 218,60.5 218.5,60.5 218.5,58.5 Q4.2 | 210.5,57.5 208.5,59.5 207.5,59.5 205.5,61.5 203,61.5 LED26.3-GND 202.5,61.5 201.5,61.5 199.5,59.5 188,59.5 187.5,60 | 217.5,61 214,57.5 210.5,57.5
  Bottom 0.35: v182.5,22.5 184,21 v184,15 | v212.5,23 v205.5,16 | v9,11 12,8 12,5 9.5,2.5 SL8.3 | SL7.3 9,81 10.5,79.5 10.5,75 21.5,64 21.5,63 SL1.3 21.5,62.5 v21.5,59 14,51.5 14,45.5 14.5,45 14.5,26.5 v18.5,22.5 | v54,67 57.5,63.5 v57.5,60.5 | v84.5,79 85.5,78 85.5,63.5 86.5,62.5 | v74.5,61.5 80,61.5 81,60.5 86,60.5 86,61 86.5,61.5 86.5,62.5 | 86.5,62.5 SL2.3 | v139,61 139,60.5 149.5,60.5 151.5,62.5 SL3.3
IO0_0  (via drill 0.35)
  Top 0.152: U3.4 v53.45,76.62
  Top 0.35: R37.2 21,72 22.5,72 24.5,74 v25,74
  Bottom 0.35: v25,74 28,71 52.5,71 52.5,76 53.5,77 v53.45,76.62
IO0_1  (via drill 0.35)
  Top 0.152: U3.5 v50.81,75.97
  Top 0.35: R38.2 82,69 81.5,69.5 v65.5,69.5
  Bottom 0.35: v65.5,69.5 61.5,73.5 61.5,77.5 59.5,79.5 52,79.5 52,77 51,76 v50.81,75.97
IO0_2  (via drill 0.35)
  Top 0.152: v53.45,75.33 U3.6
  Top 0.35: R39.2 150,71 v149.5,71 | v57,69.5 54.5,72 54.5,75 53.5,75 v53.45,75.33
  Bottom 0.35: v149.5,71 132,71 124,79 85.5,79 84.5,80 66.5,80 66.5,69.5 65,68 57,68 v57,69.5
IO0_3  (via drill 0.35)
  Top 0.152: U3.7 v50.81,74.67
  Top 0.35: v214.5,70 R40.2 | v86.5,76 85.5,75 v80.5,75 | v54,68 51.5,70.5 51,70.5 49.5,72 49.5,74 50,74 50.5,74.5 v50.81,74.67
  Bottom 0.35: v214.5,70 132,70 126,76 v86.5,76 | v80.5,75 72.5,67 55,67 v54,68
IO0_4  (via drill 0.35)
  Top 0.152: U3.8 v53.45,74.03
IO0_5  (via drill 0.35)
  Top 0.152: U3.9 v50.81,73.38
IO0_6  (via drill 0.35)
  Top 0.152: U3.10 v53.45,72.72
IO0_7  (via drill 0.35)
  Top 0.152: U3.11 v50.81,72.08
IO1_0  (via drill 0.35)
  Top 0.152: U3.13 v56.55,71.42
IO1_1  (via drill 0.35)
  Top 0.152: v59.19,72.08 U3.14
IO1_2  (via drill 0.35)
  Top 0.152: U3.15 v56.55,72.72
IO1_3  (via drill 0.35)
  Top 0.152: v59.19,73.38 U3.16
IO1_4  (via drill 0.35)
  Top 0.152: U3.17 v56.55,74.03
IO1_5  (via drill 0.35)
  Top 0.152: v59.19,74.67 U3.18
IO1_6  (via drill 0.35)
  Top 0.152: U3.19 v56.55,75.33
IO1_7  (via drill 0.35)
  Top 0.152: v59.19,75.97 U3.20
N$1
  Top 0.35: R1.2 36.5,38.5 36.5,35 PAGER.1
N$2  (via drill 0.35)
  Top 0.35: v20.5,9.5 11.5,9.5 10.5,8.5 8,8.5 LED5.4-DIN | v61,61 61.5,61.5 62,61.5 LED4.2-DOUT
  Bottom 0.35: v20.5,9.5 24.5,9.5 25.5,8.5 61,8.5 v61,61
N$3  (via drill 0.35)
  Top 0.35: v87,53.5 80,53.5 75,58.5 73,58.5 LED10.4-DIN | v125.5,10.5 126.5,11.5 127,11.5 LED9.2-DOUT
  Bottom 0.35: v87,53.5 94.5,46 94.5,45.5 116.5,23.5 116.5,19.5 v125.5,10.5
N$4  (via drill 0.35)
  Top 0.35: v95.5,65 82,65 82,68 81.5,68.5 79.5,68.5 79.5,64 77.5,62 LED10.2-DOUT | v121,58 121.5,58.5 122.5,58.5 LED11.4-DIN
  Bottom 0.35: v95.5,65 101.5,65 101.5,63.5 107,58 v121,58
N$5  (via drill 0.35)
  Top 0.35: 75,31 75,30 R3.2 | 75,31 LED14.A | v100,11 101,10 LED13.A | v76.5,30.5 76,31 75,31 | LED15.A 125,25 120.5,25 | v114,25 120.5,25 | v101,58.5 101,60 LED16.A | 120.5,25 v120.5,25.5
  Bottom 0.35: v76.5,30.5 93.5,13.5 93.5,10 99,10 v100,11 v114,25 | v101,58.5 120.5,39 v120.5,25.5
N$6
  Top 0.35: R4.2 101.5,38.5 101.5,35 PAGER1.1
N$7  (via drill 0.35)
  Top 0.35: v139,58.5 138,58.5 LED18.4-DIN | v162,32 v156.5,37.5 | v183,14 186.5,10.5 190.5,10.5 191.5,11.5 192,11.5 LED17.2-DOUT
  Bottom 0.35: v139,58.5 156.5,41 v156.5,37.5 | v162,32 180,14 v183,14
N$8  (via drill 0.35)
  Top 0.35: v145.5,64 144.5,64 142.5,62 LED18.2-DOUT | v186,59 186.5,58.5 187.5,58.5 LED19.4-DIN
  Bottom 0.35: v145.5,64 146,64.5 186,64.5 v186,59
N$9  (via drill 0.35)
  Top 0.35: v162,12.5 166,12.5 166,10 LED21.A | v141.5,29 141,29.5 140.5,29.5 R5.2 140,30 LED22.A | v188.5,34 190,34 LED23.A | v167.5,60 LED24.A
  Bottom 0.35: v141.5,29 141.5,16.5 158,16.5 v162,12.5 163.5,11 163.5,10.5 180.5,10.5 186.5,16.5 186.5,32 v188.5,34 188.5,50 177.5,50 v167.5,60
N$10
  Top 0.35: R6.2 166.5,38.5 166.5,35 PAGER2.1
N$11  (via drill 0.35)
  Top 0.35: v202.5,57 202.5,58 LED26.4-DIN | v257,10.5 258,11.5 257.5,12 LED25.2-DOUT
  Bottom 0.35: v202.5,57 202.5,9 204,7.5 257,7.5 v257,10.5
N$12  (via drill 0.35)
  Top 0.35: v208.5,63 207.5,62 LED26.2-DOUT | v251,59 251.5,58.5 252.5,58.5 LED27.4-DIN
  Bottom 0.35: v208.5,63 215,69.5 251,69.5 v251,59
N$13  (via drill 0.35)
  Top 0.35: LED30.A 205,30 R7.2 205.5,29.5 v207.5,29.5 | v232.5,10 LED29.A | v249.5,29.5 254,34 255,34 LED31.A | v231,58.5 231,60 LED32.A
  Bottom 0.35: 247,24.5 249.5,27 v249.5,29.5 | 247,24.5 v232.5,10 227,10 v207.5,29.5 | v231,58.5 239.5,50 239.5,32 247,24.5
N$14
  Top 0.35: R8.2 231.5,38.5 231.5,35 PAGER3.1
N$15  (via drill 0.35)
  Top 0.35: R9.1 28.5,70.5 49.5,70.5 54.5,65.5 v56.5,65.5 | v86.5,71.5 v80.5,71.5 | v126,75 126.5,75.5 127.5,75.5 U2.4
  Bottom 0.35: v56.5,65.5 80.5,65.5 v80.5,71.5 | v86.5,71.5 90,75 v126,75
N$16
  Top 0.35: R10.1 94.5,71.5 127,71.5 127.5,72 U2.7
N$17
  Top 0.35: R11.1 156,69 149,69 147.5,70.5 132.5,70.5 U2.9
N$18  (via drill 0.35)
  Top 0.35: R12.1 221,71 v220.5,71 | v134,75.5 133.5,76 133,76 132.5,75.5 U2.13
  Bottom 0.35: v220.5,71 150.5,71 146,75.5 v134,75.5
N$19  (via drill 0.35)
  Top 0.35: R13.2 22.5,70.5 22.5,71 24.5,73 v27,73 | v47.5,81 v46.5,80 | v126,79 127,78 127.5,78 U2.2
  Bottom 0.35: v27,73 34,80 v46.5,80 | v47.5,81 50,83.5 126,83.5 v126,79
N$20
  Top 0.35: U2.3 124.09,76.91 R14.2
N$21
  Top 0.35: R15.2 93,73 127.5,73 U2.6
N$22
  Top 0.35: R16.2 151.5,72.5 134,72.5 133.5,73 132.5,73 U2.11
N$23
  Top 0.35: U2.12 136.63,74.36 R17.2
N$24  (via drill 0.35)
  Top 0.35: v217,72 R18.2 | v134,78.5 133.5,78 132.5,78 U2.15
  Bottom 0.35: v217,72 160.5,72 154,78.5 v134,78.5
N$29  (via drill 0.35)
  Top 0.35: v204,8.5 203,8.5 LED28.4-DIN | v256,61 256.5,61.5 257,61.5 LED27.2-DOUT
  Bottom 0.35: v204,8.5 256,8.5 v256,61
N$30  (via drill 0.35)
  Top 0.35: v139,8.5 138,8.5 LED20.4-DIN | v190.5,60.5 191.5,61.5 192,61.5 LED19.2-DOUT
  Bottom 0.35: v139,8.5 190.5,8.5 v190.5,60.5
N$31  (via drill 0.35)
  Top 0.35: v74,8.5 73,8.5 LED12.4-DIN | v126.5,60.5 127.5,61.5 LED11.2-DOUT
  Bottom 0.35: v74,8.5 126.5,8.5 v126.5,60.5
N$35  (via drill 0.35)
  Top 0.35: LED6.A 10,30 R2.2 10.5,29.5 v30.5,29.5 | v37.5,10 LED1.A | v58.5,33.5 59,34 60,34 LED7.A | v38.5,57.5 36.5,59.5 36.5,60 LED8.A
  Bottom 0.35: 45.5,18 58.5,31 v58.5,33.5 58.5,37.5 v38.5,57.5 | 45.5,18 v37.5,10 | v30.5,29.5 34,29.5 45.5,18
N$38  (via drill 0.35)
  Top 0.35: v30.5,43.5 28,43.5 25,46.5 14.5,46.5 14.5,52.5 8.5,58.5 8,58.5 LED3.4-DIN | v43.5,30.5 50.5,23.5 55,23.5 63,15.5 63,11.5 62.5,11.5 LED2.2-DOUT
  Bottom 0.35: v43.5,30.5 v30.5,43.5
N$39  (via drill 0.35)
  Top 0.35: v31.5,60.5 16,60.5 15,61.5 12.5,61.5 LED3.2-DOUT | v56,58 56.5,58.5 57.5,58.5 LED4.4-DIN
  Bottom 0.35: v31.5,60.5 56,60.5 v56,58
NEO_PIXEL_IN  (via drill 0.35)
  Top 0.35: v28.5,67 R25.2
  Bottom 0.35: v28.5,67 26.5,67 24.5,69 24.5,73.5 23.5,74.5 23.5,79.5 22,81 SL7.8
NEO_PIXEL_OUT  (via drill 0.35)
  Top 0.35: R28.2 225,65 v218,65
  Bottom 0.35: v218,65 213,65 213,61.5 212,60.5 200.5,60.5 200.5,17 186.5,3 22,3 22,2.5 SL8.8
SCL  (via drill 0.35)
  Top 0.152: v59.19,77.28 U3.22
  Top 0.35: R23.1 13,77 13,79.5 13.5,80 13.5,81 | v61,79 59.5,77.5 59,77.5 v59.19,77.28 | v50,82.5 49.5,83 16,83 | 16,83 14.5,81.5 14,81.5 13.5,81 | 13.5,81 SL7.5 | v4.5,8.5 8,5 13,5 13,3.5 14,2.5 SL8.5 | v2.5,82.5 3,83 16,83
  Bottom 0.35: v61,79 57.5,82.5 v50,82.5 | v4.5,8.5 1.5,11.5 1.5,81.5 v2.5,82.5
SDA  (via drill 0.35)
  Top 0.152: U3.23 v56.55,77.92
  Top 0.35: R24.1 11.5,81 SL7.4 | v25.5,70 24.5,71 v23.5,71 | v15,45.5 v13,43.5
  Bottom 0.35: v25.5,70 53.5,70 54.5,71 54.5,76 56.5,78 v56.55,77.92 | v23.5,71 22.5,72 22.5,73 20.5,75 | 20.5,75 17.5,78 11.5,78 11.5,81 SL7.4 | v13,43.5 13,33.5 13.5,33 13.5,4 12,2.5 SL8.4 | v15,45.5 23,53.5 23,68.5 20.5,71 20.5,75

## Text on the board
tPlace: Assistive Button Board / V 1.0 2025/03/19 | A0 / 1 0 | A1 / 1 0 | A2 / 1 0